# EAGLE board PCB (EAGLE 9.7.0)
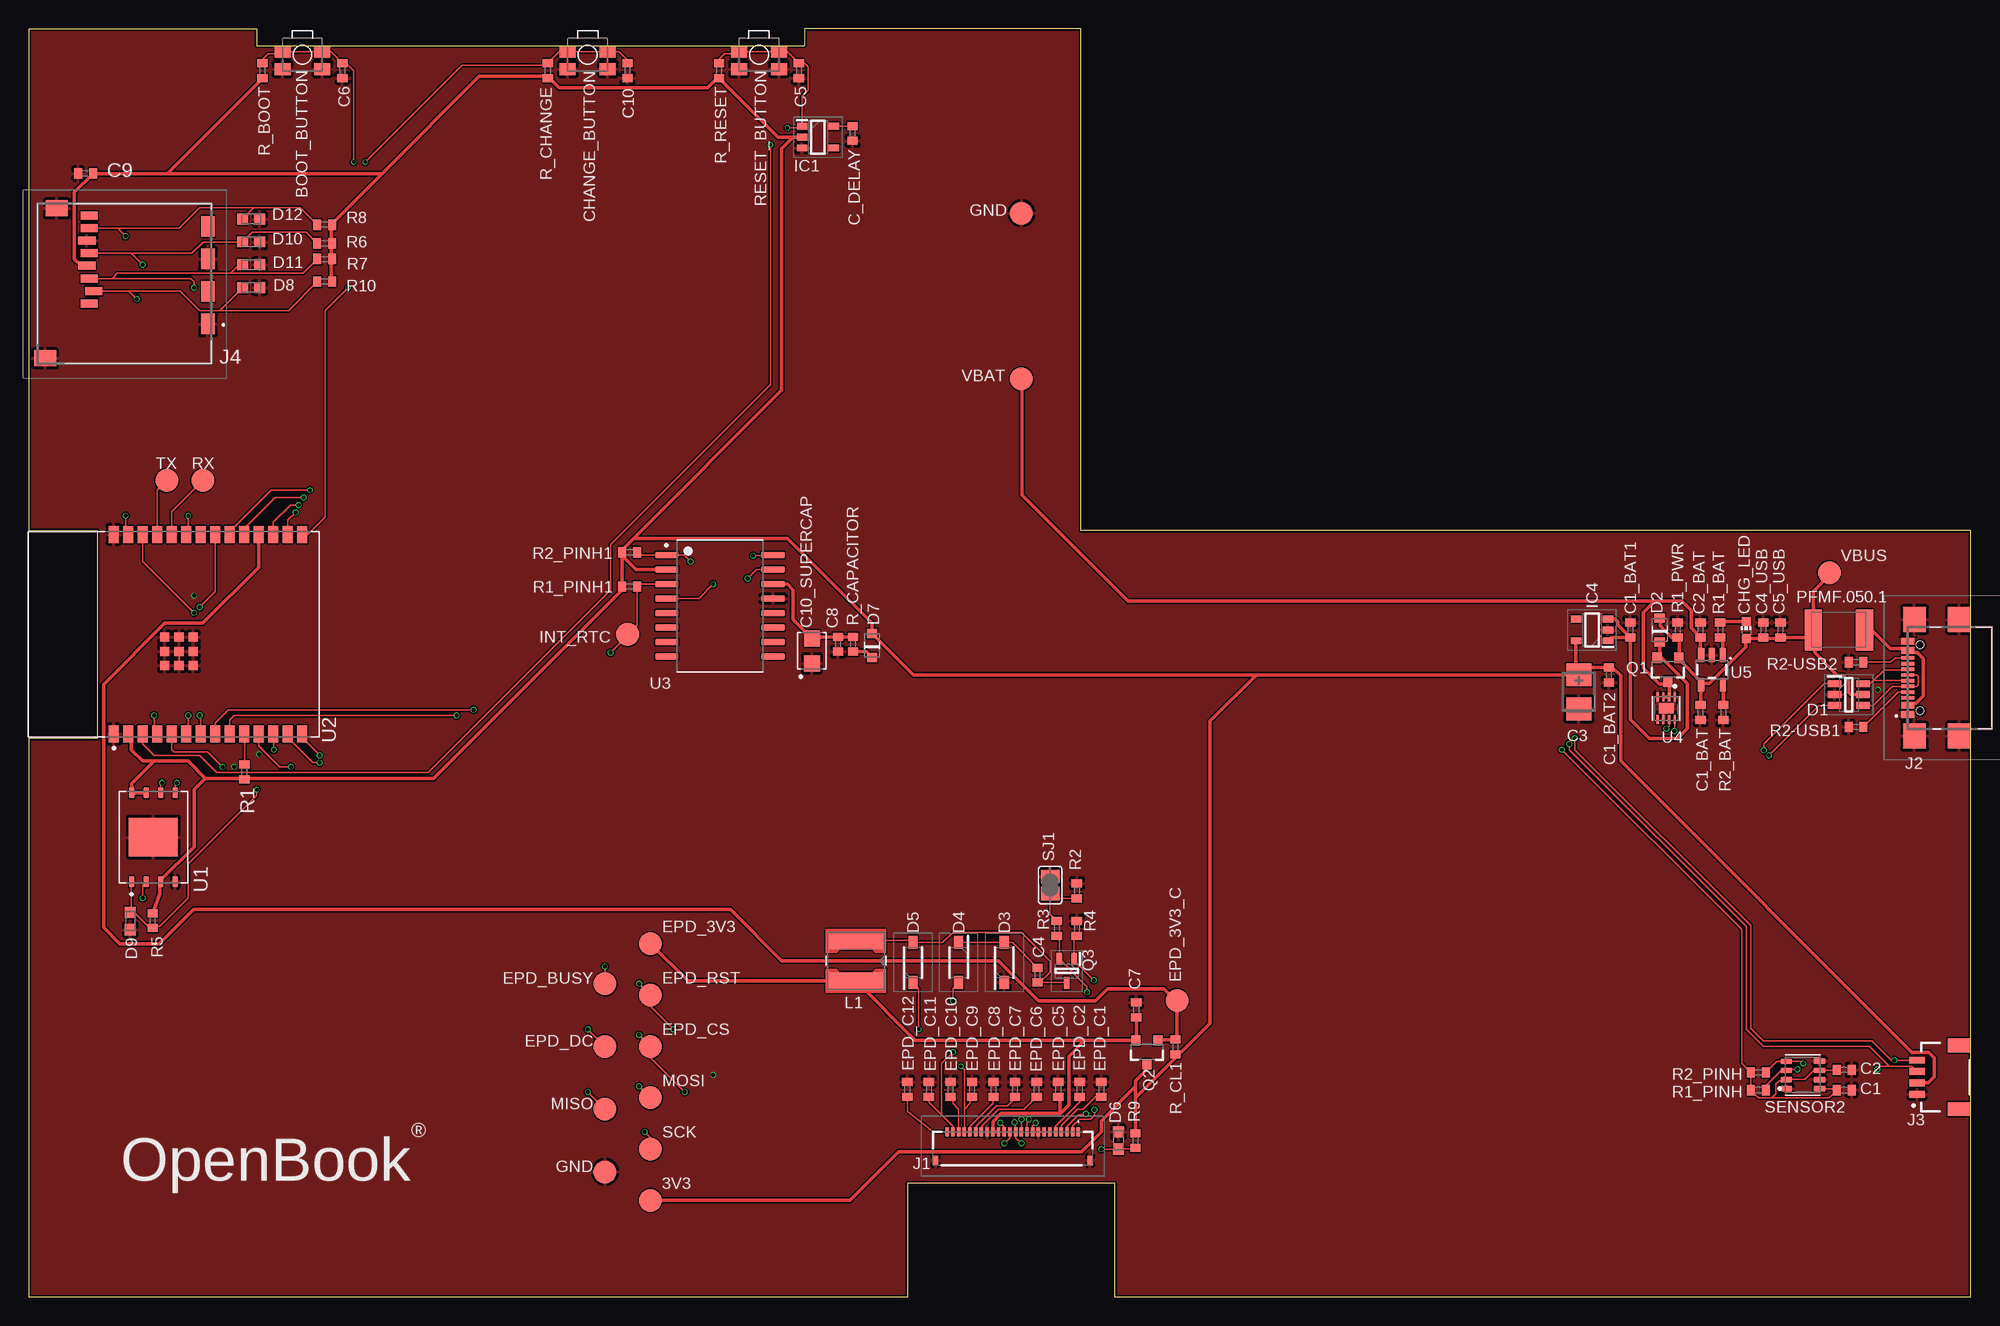
[diagram p0: board, top side]
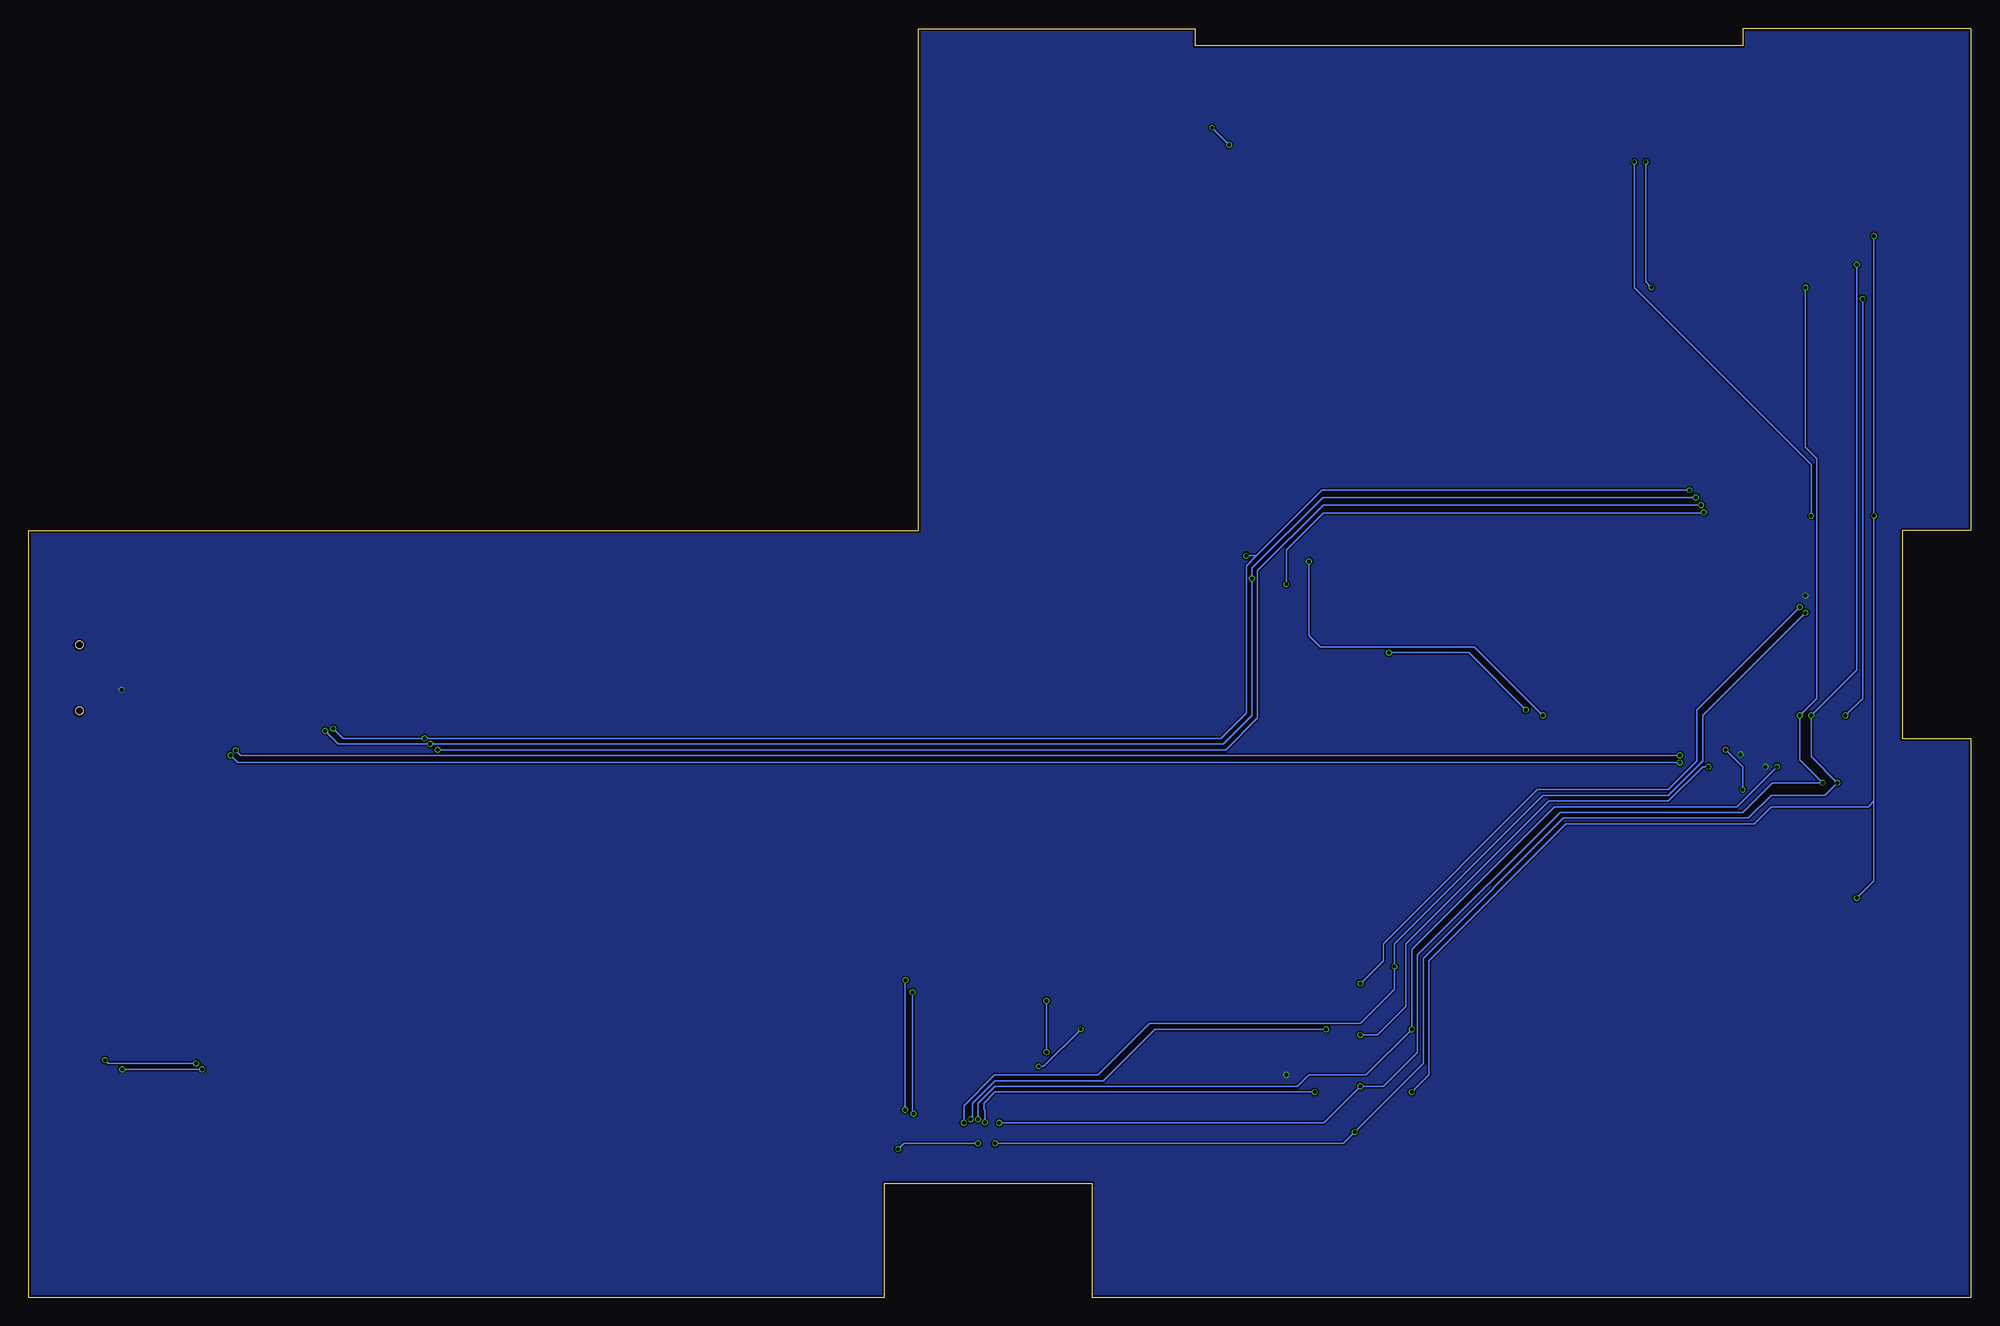
[diagram p1: board, bottom side, seen from below]

Size 170.2 x 111.2 mm. Coordinates in mm from the lower left corner, seen from the top.
Outline: 0,111.2 0,67.2 6,67.2 6,49 0,49 0,0 77,0 77,10 95.2,10 95.2,0 170.2,0 170.2,67.2 92.2,67.2 92.2,111.2 68,111.2 68,109.7 20,109.7 20,111.2 0,111.2
Copper layers (1*16): Top 0.035mm / dielectric 1.6mm / Bottom 0.035mm
Design rules "jlcpcb-2layers.dru *": minimum track width 0.15mm, minimum drill 0.3mm, track to track 5mil, track to pad 5mil, pad to pad 5mil, via to via 5mil, smd to smd 5mil, copper to edge 0.2mm, drill to drill 6mil, minimum pad ring 10mil, minimum via ring 3mil, stop-mask expansion 4mil, vias tented up to drill 0mil, thermal gap 10mil
Net classes: 1 power: width 0.3 mm

## Footprints (pad centres in the part's own frame; a part is rotated, then mirrored left to right if it is on the bottom)
MYBUTTON = smd 1.4 x 1.05: 1 1.75,1.258; 2 -1.75,1.258; 3 -1.75,-0.242; 4 1.75,-0.242
EAGLE-LTSPICE_C0402 = smd 0.7 x 0.9: 1 -0.65,0; 2 0.65,0
RCL_CT3528 = smd 2 x 2.2: + -1.5,0; - 1.5,0
CAPCP3225X100N = smd 1.4 x 1.4: 1 -1.1,0; 2 1.1,0
ADAFRUIT_CHIP-LED0603 = smd 0.8 x 0.8: A 0,-0.75; C 0,0.75
SOT95P280X145-6N = smd 1.2 x 0.6: 1 -1.25,0.95; 2 -1.25,0; 3 -1.25,-0.95; 4 1.25,-0.95; 5 1.25,0; 6 1.25,0.95
ESP32_WROVER_AVX---SD0805S020S1R0_AVX_SD0805S020S1R0_0 = smd 0.8 x 0.9: 1 -1.05,0; 2 1.05,0
SOD3716X135N = smd 1.15 x 0.8: 1 -1.75,0; 2 1.75,0
DIOC1608X36N = smd 0.97 x 0.94: 1 -0.75,0; 2 0.75,0
SOT95P280X125-5N = smd 0.9 x 0.6: 1 -1.4,0.95; 2 -1.4,0; 3 -1.4,-0.95; 4 1.4,-0.95; 5 1.4,0.95
SOT95P280X120-5N = smd 0.9 x 0.6: 1 -1.4,0.95; 2 -1.4,0; 3 -1.4,-0.95; 4 1.4,-0.95; 5 1.4,0.95
FH34SRJ24S05SH99 = smd 0.3 x 0.8: 1 5.75,1.45; 2 5.25,1.45; 3 4.75,1.45; 4 4.25,1.45; 5 3.75,1.45; 6 3.25,1.45; 7 2.75,1.45; 8 2.25,1.45; 9 1.75,1.45; 10 1.25,1.45; 11 0.75,1.45; 12 0.25,1.45; 13 -0.25,1.45; 14 -0.75,1.45; 15 -1.25,1.45; 16 -1.75,1.45; 17 -2.25,1.45; 18 -2.75,1.45; 19 -3.25,1.45; 20 -3.75,1.45; 21 -4.25,1.45; 22 -4.75,1.45; 23 -5.25,1.45; 24 -5.75,1.45 | smd 0.4 x 0.8: MP1 6.75,-1.05; MP2 -6.75,-1.05
SAMACSYS_PARTS_USB4110GFA = smd 0.3 x 1.15: A1 -3.35,3.678; A4 -2.55,3.678; A5 -1.25,3.678; A6 -0.25,3.678; A7 0.25,3.678; A8 1.25,3.678; A9 2.55,3.678; A12 3.35,3.678; B1 3.05,3.678; B4 2.25,3.678; B5 1.75,3.678; B6 0.75,3.678; B7 -0.75,3.678; B8 -1.75,3.678; B9 -2.25,3.678; B12 -3.05,3.678 | smd 2.18 x 2: MP1 -5.11,-0.827; MP2 5.11,-0.827; MP3 -5.11,3.103; MP4 5.11,3.103 | hole 0.65: -2.89,2.603; 2.89,2.603
JST04_1MM_RA = smd 0.6 x 1.35: 1 -1.5,0; 2 -0.5,0; 3 0.5,0; 4 1.5,0 | smd 1.2 x 2: NC1 2.8,-3.675; NC2 -2.8,-3.675
112ATAARR03ATTEND = smd 1.8 x 1.2: G1 10.6,10.4; G2 4.9,10.4; S1 7.75,10.4; S2 2.05,10.4 | smd 1.4 x 1.9: G3 13.6,-3.85; G4 0.45,-2.85 | smd 0.7 x 1.5: P1 8.8,0; P2 7.7,0.4; P3 6.6,0; P4 5.5,-0.2; P5 4.4,0; P6 3.3,-0.2; P7 2.2,0; P8 1.1,0
IND_4828-WE-TPC_WRE = smd 1.524 x 5.08: 1 -1.778,0; 2 1.778,0
ESP32C6_VARISTOR_CT/CN1812 = smd 1.5 x 3.6: 1 -2.25,0; 2 2.25,0
ESP32_WROVER_SPARKFUN-DISCRETESEMI_SOT23-3 = smd 0.8 x 0.9: 1 -0.95,-1; 2 0.95,-1; 3 0,1.1
SOT65P210X110-3N = smd 1.05 x 0.5: 1 -1.05,0.65; 2 -1.05,-0.65; 3 1.05,0
ESP32_WROVER_EAGLE-LTSPICE_R0402 = smd 0.7 x 0.9: 1 -0.65,0; 2 0.65,0
ESP32_WROVER_BME680_PSON80P300X300X100-8N = smd 1.016 x 0.5: 1 1.458,1.2; 2 1.458,0.4; 3 1.458,-0.4; 4 1.458,-1.2; 5 -1.458,-1.22; 6 -1.458,-0.4; 7 -1.458,0.4; 8 -1.458,1.2
SJ = smd 1.168 x 1.6: 1 -0.762,0; 2 0.762,0
TP20R = smd 2 x 2: TP 0,0
SON127P600X800X80-9N = smd 0.94 x 0.44: 1 -3.895,1.905; 2 -3.895,0.635; 3 -3.895,-0.635; 4 -3.895,-1.905; 5 3.895,-1.905; 6 3.895,-0.635; 7 3.895,0.635; 8 3.895,1.905 | smd 3.4 x 4.3: 9 0,0
XCVR_ESP32-C6-WROOM-1-N8 = smd 1.5 x 0.9: 1 -8.75,5.26; 2 -8.75,3.99; 3 -8.75,2.72; 4 -8.75,1.45; 5 -8.75,0.18; 6 -8.75,-1.09; 7 -8.75,-2.36; 8 -8.75,-3.63; 9 -8.75,-4.9; 10 -8.75,-6.17; 11 -8.75,-7.44; 12 -8.75,-8.71; 13 -8.75,-9.98; 14 -8.75,-11.25; 15 8.75,-11.25; 16 8.75,-9.98; 17 8.75,-8.71; 18 8.75,-7.44; 19 8.75,-6.17; 20 8.75,-4.9; 21 8.75,-3.63; 22 8.75,-2.36; 23 8.75,-1.09; 24 8.75,0.18; 25 8.75,1.45; 26 8.75,2.72; 27 8.75,3.99; 28 8.75,5.26 | smd 0.8 x 0.8: 29_1 -2.755,0.79; 29_2 -1.505,0.79; 29_3 -0.255,0.79; 29_4 -2.755,-0.46; 29_5 -1.505,-0.46; 29_6 -0.255,-0.46; 29_7 -2.755,-1.71; 29_8 -1.505,-1.71; 29_9 -0.255,-1.71
SOIC127P1032X265-16N = smd 2.05 x 0.59: 1 -4.655,4.445; 2 -4.655,3.175; 3 -4.655,1.905; 4 -4.655,0.635; 5 -4.655,-0.635; 6 -4.655,-1.905; 7 -4.655,-3.175; 8 -4.655,-4.445; 9 4.655,-4.445; 10 4.655,-3.175; 11 4.655,-1.905; 12 4.655,-0.635; 13 4.655,0.635; 14 4.655,1.905; 15 4.655,3.175; 16 4.655,4.445
SON50P200X200X80-9N = smd 0.76 x 0.27: 1 -0.985,0.75; 2 -0.985,0.25; 3 -0.985,-0.25; 4 -0.985,-0.75; 5 0.985,-0.75; 6 0.985,-0.25; 7 0.985,0.25; 8 0.985,0.75 | smd 0.9 x 1.3: 9 0,0
ESP32_WROVER_SPARKFUN-IC-POWER_SOT23-5 = smd 0.55 x 1.2: 1 -0.95,-1.3; 2 0,-1.3; 3 0.95,-1.3; 4 0.95,1.3; 5 -0.95,1.3

## Placement (x,y rotation side)
BOOT_BUTTON  BUTTON_CUSYOMV1  [MYBUTTON]  24,108.91 180 top
C1  100nF  [EAGLE-LTSPICE_C0402]  159.1,18.17 0 top
C1_BAT  4.7uF  [EAGLE-LTSPICE_C0402]  146.5,51.25 270 top
C1_BAT1  4.7uF  [EAGLE-LTSPICE_C0402]  140.35,58.5 90 top
C1_BAT2  4.7uF  [EAGLE-LTSPICE_C0402]  138.48,54.56 270 top
C2  100nF  [EAGLE-LTSPICE_C0402]  159.1,19.94 0 top
C2_BAT  4.7uF  [EAGLE-LTSPICE_C0402]  146.5,58.5 90 top
C3  100uF  [RCL_CT3528]  135.84,53.07 270 top
C4  4.7uF/25V  [EAGLE-LTSPICE_C0402]  88.4,28.25 270 top
C4_USB  100nF  [EAGLE-LTSPICE_C0402]  152,58.5 90 top
C5  1uF  [EAGLE-LTSPICE_C0402]  67.5,107.5 270 top
C5_USB  4.7uF  [EAGLE-LTSPICE_C0402]  153.5,58.5 90 top
C6  100nF  [EAGLE-LTSPICE_C0402]  27.5,107.5 270 top
C7  10uF  [EAGLE-LTSPICE_C0402]  97.06,25.21 90 top
C8  100nF  [EAGLE-LTSPICE_C0402]  70.94,57.24 270 top
C9  100nF  [EAGLE-LTSPICE_C0402]  5,98.5 180 top
C10  100nF  [EAGLE-LTSPICE_C0402]  52.5,107.5 270 top
C10_SUPERCAP  CPH3225A  [CAPCP3225X100N]  68.65,56.66 90 top
C_DELAY  100nF  [EAGLE-LTSPICE_C0402]  72.2,102.01 270 top
CHANGE_BUTTON  BUTTON_CUSYOMV1  [MYBUTTON]  49,108.91 180 top
CHG_LED  [ADAFRUIT_CHIP-LED0603]  150.5,58.5 0 top
D1  USBLC6-2SC6Y  [SOT95P280X145-6N]  159.5,52.83 0 top
D2  ESP32_WROVER_AVX---SD0805S020S1R0_AVX_SD0805S020S1R0_0_0AVX_SD0805S020S1R0_0_0  [ESP32_WROVER_AVX---SD0805S020S1R0_AVX_SD0805S020S1R0_0]  142.93,58.5 90 top
D3  MBR0530  [SOD3716X135N]  85.5,29.35 90 top
D4  MBR0530  [SOD3716X135N]  81.5,29.35 270 top
D5  MBR0530  [SOD3716X135N]  77.5,29.35 90 top
D6  PGB1010603MR  [DIOC1608X36N]  95.5,13.76 270 top
D7  ESP32_WROVER_AVX---SD0805S020S1R0_AVX_SD0805S020S1R0_0_0AVX_SD0805S020S1R0_0_0  [ESP32_WROVER_AVX---SD0805S020S1R0_AVX_SD0805S020S1R0_0]  73.91,57.14 90 top
D8  PGB1010603MR  [DIOC1608X36N]  19.5,88.5 180 top
D9  PGB1010603MR  [DIOC1608X36N]  8.92,32.98 90 top
D10  PGB1010603MR  [DIOC1608X36N]  19.5,92.5 180 top
D11  PGB1010603MR  [DIOC1608X36N]  19.5,90.5 180 top
D12  PGB1010603MR  [DIOC1608X36N]  19.5,94.5 180 top
EPD_C1  1uF/50V  [EAGLE-LTSPICE_C0402]  94,18.25 90 top
EPD_C2  1uF/50V  [EAGLE-LTSPICE_C0402]  92.11,18.25 90 top
EPD_C5  0.1uF/50V  [EAGLE-LTSPICE_C0402]  90.22,18.25 90 top
EPD_C6  1uF/50V  [EAGLE-LTSPICE_C0402]  88.33,18.25 90 top
EPD_C7  1uF/50V  [EAGLE-LTSPICE_C0402]  86.44,18.25 90 top
EPD_C8  1uF/50V  [EAGLE-LTSPICE_C0402]  84.56,18.25 90 top
EPD_C9  1uF/50V  [EAGLE-LTSPICE_C0402]  82.67,18.25 90 top
EPD_C10  1uF/50V  [EAGLE-LTSPICE_C0402]  80.78,18.25 90 top
EPD_C11  1uF/50V  [EAGLE-LTSPICE_C0402]  78.89,18.25 90 top
EPD_C12  1uF/50V  [EAGLE-LTSPICE_C0402]  77,18.25 90 top
IC1  BD5229G-TR  [SOT95P280X125-5N]  69.17,101.68 0 top
IC4  XC6220A331MR-G  [SOT95P280X120-5N]  137,58.5 180 top
J1  FH34SRJ-24S-0.5SH_99_  [FH34SRJ24S05SH99]  86.24,13.05 0 top
J2  SAMACSYS_PARTS_USB4110-GF-A  [SAMACSYS_PARTS_USB4110GFA]  168.36,54.3 90 top
J3  QWIIC_RIGHT_ANGLE  [JST04_1MM_RA]  165.48,19.3 90 top
J4  112A-TAAR-R03_ATTEND  [112ATAARR03ATTEND]  5.32,95.9 270 top
L1  744043680IND_4828-WE-TPC_WRE  [IND_4828-WE-TPC_WRE]  72.5,29.5 270 top
PFMF.050.1  ESP32C6_VARISTORCN1812  [ESP32C6_VARISTOR_CT/CN1812]  158.62,58.5 180 top
Q1  20V/4.2A/52mΩ/1.4W  [ESP32_WROVER_SPARKFUN-DISCRETESEMI_SOT23-3]  143.65,55.05 180 top
Q2  20V/4.2A/52mΩ/1.4W  [ESP32_WROVER_SPARKFUN-DISCRETESEMI_SOT23-3]  98,21.52 180 top
Q3  SI1308EDL-T1-GE3  [SOT65P210X110-3N]  90.97,28.6 270 top
R1  10k  [ESP32_WROVER_EAGLE-LTSPICE_R0402]  18.92,46.05 270 top
R1_BAT  200  [ESP32_WROVER_EAGLE-LTSPICE_R0402]  148.22,58.5 90 top
R1_PINH  10k  [ESP32_WROVER_EAGLE-LTSPICE_R0402]  151.56,18.17 180 top
R1_PINH1  10k  [ESP32_WROVER_EAGLE-LTSPICE_R0402]  52.67,62.3 180 top
R1_PWRUSB  100k  [ESP32_WROVER_EAGLE-LTSPICE_R0402]  144.5,58.5 270 top
R2  2.2  [ESP32_WROVER_EAGLE-LTSPICE_R0402]  91.86,35.64 270 top
R2-USB1  5K1  [ESP32_WROVER_EAGLE-LTSPICE_R0402]  160.13,50 0 top
R2-USB2  5K1  [ESP32_WROVER_EAGLE-LTSPICE_R0402]  160.13,55.67 180 top
R2_BAT  2k  [ESP32_WROVER_EAGLE-LTSPICE_R0402]  148.5,51.25 90 top
R2_PINH  10k  [ESP32_WROVER_EAGLE-LTSPICE_R0402]  151.56,19.72 180 top
R2_PINH1  10k  [ESP32_WROVER_EAGLE-LTSPICE_R0402]  52.67,65.3 180 top
R3  0.47  [ESP32_WROVER_EAGLE-LTSPICE_R0402]  90.1,32.35 270 top
R4  10k  [ESP32_WROVER_EAGLE-LTSPICE_R0402]  91.86,32.35 270 top
R5  10k  [ESP32_WROVER_EAGLE-LTSPICE_R0402]  10.88,33.02 90 top
R6  10k  [ESP32_WROVER_EAGLE-LTSPICE_R0402]  25.95,92.37 0 top
R7  10k  [ESP32_WROVER_EAGLE-LTSPICE_R0402]  25.95,91 0 top
R8  10k  [ESP32_WROVER_EAGLE-LTSPICE_R0402]  25.95,94 0 top
R9  10k  [ESP32_WROVER_EAGLE-LTSPICE_R0402]  97,13.74 90 top
R10  10k  [ESP32_WROVER_EAGLE-LTSPICE_R0402]  25.95,89.02 0 top
R_BOOT  10k  [ESP32_WROVER_EAGLE-LTSPICE_R0402]  20.5,107.5 90 top
R_CAPACITOR  15  [ESP32_WROVER_EAGLE-LTSPICE_R0402]  72.25,57.24 270 top
R_CHANGE  10k  [ESP32_WROVER_EAGLE-LTSPICE_R0402]  45.5,107.5 90 top
R_CL1  10k  [ESP32_WROVER_EAGLE-LTSPICE_R0402]  100.5,21.97 270 top
R_RESET  10k  [ESP32_WROVER_EAGLE-LTSPICE_R0402]  60.5,107.5 90 top
RESET_BUTTON  BUTTON_CUSYOMV1  [MYBUTTON]  64,108.91 180 top
SENSOR2  ESP32_WROVER_BME680_BME680  [ESP32_WROVER_BME680_PSON80P300X300X100-8N]  155.47,19.5 180 top
SJ1  [SJ]  89.52,36.14 270 top
TP1  TPTP20R  [TP20R]  12.12,71.6 0 top
TP2  TPTP20R  [TP20R]  15.28,71.6 0 top
TP3  TPTP20R  [TP20R]  87,80.5 0 top
TP4  TPTP20R  [TP20R]  87,95 0 top
TP5  TPTP20R  [TP20R]  50.5,11 90 top
TP6  TPTP20R  [TP20R]  50.5,16.5 90 top
TP7  TPTP20R  [TP20R]  54.5,17.5 270 top
TP8  TPTP20R  [TP20R]  54.5,13 270 top
TP9  TPTP20R  [TP20R]  50.5,27.5 270 top
TP10  TPTP20R  [TP20R]  54.5,22 270 top
TP11  TPTP20R  [TP20R]  50.5,22 270 top
TP12  TPTP20R  [TP20R]  54.5,26.5 270 top
TP13  TPTP20R  [TP20R]  100.64,26.02 0 top
TP14  TPTP20R  [TP20R]  157.79,63.52 0 top
TP15  TPTP20R  [TP20R]  52.49,58.1 0 top
TP16  TPTP20R  [TP20R]  54.5,8.5 90 top
TP17  TPTP20R  [TP20R]  54.5,31 270 top
U1  W25Q512JVEIQ  [SON127P600X800X80-9N]  10.94,40.33 90 top
U2  ESP32-C6-WROOM-1-N8  [XCVR_ESP32-C6-WROOM-1-N8]  12.73,58.12 90 top
U3  DS3231SN#  [SOIC127P1032X265-16N]  60.59,60.6 0 top
U4  MAX17048G+T10  [SON50P200X200X80-9N]  143.5,51.63 270 top
U5  ESP32_WROVER_SPARKFUN-IC-POWER_MCP73831  [ESP32_WROVER_SPARKFUN-IC-POWER_SOT23-5]  147.5,55 180 top

## Library data of the parts
BOOT_BUTTON CHANGE_BUTTON CHG_LED PFMF.050.1 RESET_BUTTON SJ1 TP1-TP4 TP6-TP17 = tsc-lib-v1
C1 C1_BAT C1_BAT1 C1_BAT2 C2 C2_BAT C4 C4_USB C5 C5_USB C6-C10 C_DELAY EPD_C1 EPD_C2 EPD_C5-EPD_C12 = tsc-lib-v1; SPICEMODEL: NONE; SPICEPREFIX: C
C3 = tsc-lib-v1; SPICEPREFIX: C
C10_SUPERCAP = tsc-lib-v1; AVAILABILITY: Not in stock; CHECK_PRICES: https://www.snapeda.com/parts/CPH3225A/Seiko+Instruments/view-part/?ref=eda; DESCRIPTION: 11 mF (EDLC) Supercapacitor 3.3 V 1210 (3225 Metric) - -; MF: Seiko Instruments; MP: CPH3225A; PACKAGE: 1210 Seiko; PRICE: None; PURCHASE-URL: https://www.snapeda.com/api/url_track_click_mouser/?unipart_id=562593&manufacturer=Seiko Instruments&part_name=CPH3225A&search_term=None; SNAPEDA_LINK: https://www.snapeda.com/parts/CPH3225A/Seiko+Instruments/view-part/?ref=snap
D1 = tsc-lib-v1; AVAILABILITY: In Stock; CHECK_PRICES: https://www.snapeda.com/parts/USBLC6-2SC6Y/STMicroelectronics/view-part/?ref=eda; DESCRIPTION: 17V Clamp 5A (8/20µs) Ipp Tvs Diode Surface Mount SOT-23-6; MF: STMicroelectronics; MP: USBLC6-2SC6Y; PACKAGE: SOT-23-6 STMicroelectronics; PRICE: None; SNAPEDA_LINK: https://www.snapeda.com/parts/USBLC6-2SC6Y/STMicroelectronics/view-part/?ref=snap
D2 D7 = tsc-lib-v1; CENTROID_NOT_SPECIFIED: No; DATASHEET: http://datasheets.avx.com/schottky.pdf; DIGIKEY_DESCRIPTION: DIODE SCHOTTKY 20V 1A 0805; DIGIKEY_PART_NUMBER: 478-7800-1-ND; LEAD_FREE: yes; MF: AVX; MOUSER_PART_NUMBER: 581-SD0805S020S1R0; PACKAGE: 0805 (2012 metric); PREFIX: D; ROHS: yes; TEMPERATURE_RANGE_HIGH: +125°C; TEMPERATURE_RANGE_LOW: -55°C
D3-D5 = tsc-lib-v1; AVAILABILITY: In Stock; CHECK_PRICES: https://www.snapeda.com/parts/MBR0530/Onsemi/view-part/?ref=eda; DESCRIPTION: Diode Schottky 30 V 500mA Surface Mount SOD-123; MF: ON Semiconductor; MP: MBR0530; PACKAGE: SOD-123-2 ON Semiconductor; PRICE: None; PURCHASE-URL: https://www.snapeda.com/api/url_track_click_mouser/?unipart_id=179458&manufacturer=ON Semiconductor&part_name=MBR0530&search_term=None; SNAPEDA_LINK: https://www.snapeda.com/parts/MBR0530/Onsemi/view-part/?ref=snap
D6 D8-D12 = tsc-lib-v1; AVAILABILITY: In Stock; CHECK_PRICES: https://www.snapeda.com/parts/PGB1010603MR/Littelfuse/view-part/?ref=eda; DESCRIPTION: 150V (Typ) Clamp - Ipp Tvs Diode Surface Mount 0603 (1608 Metric); MF: Littelfuse Inc.; MP: PGB1010603MR; PACKAGE: 0603 Littelfuse Inc.; PRICE: None; PURCHASE-URL: https://www.snapeda.com/api/url_track_click_mouser/?unipart_id=5659453&manufacturer=Littelfuse Inc.&part_name=PGB1010603MR&search_term=None; SNAPEDA_LINK: https://www.snapeda.com/parts/PGB1010603MR/Littelfuse/view-part/?ref=snap
IC1 = tsc-lib-v1; DESCRIPTION: Voltage Detector with Adjustable Delay Time: CMOS processes are utilized to develop high precision, low current consumption CMOS reset ICs that allow arbitrary setting of the delay time. The extensive lineup includes both Nch Open Drain and CMOS output types in a wide range of detection voltages (from 2.3V to 6.0V, in 0.1V steps), enabling selection of the ideal solution based on customer requirements. In addition, the entire series is of course both lead-free and RoHS-compliant.; HEIGHT: 1.25mm; MANUFACTURER_NAME: ROHM Semiconductor; MANUFACTURER_PART_NUMBER: BD5229G-TR; MOUSER_PART_NUMBER: 755-BD5229G-TR; MOUSER_PRICE-STOCK: https://www.mouser.co.uk/ProductDetail/ROHM-Semiconductor/BD5229G-TR?qs=4kLU8WoGk0vvnhrrYwdszw%3D%3D
IC4 = tsc-lib-v1; DESCRIPTION: LDO Voltage Regulators; HEIGHT: 1.2mm; MANUFACTURER_NAME: Torex; MANUFACTURER_PART_NUMBER: XC6220A331MR-G; MOUSER_PART_NUMBER: 865-XC6220A331MR-G; MOUSER_PRICE-STOCK: https://www.mouser.co.uk/ProductDetail/Torex-Semiconductor/XC6220A331MR-G?qs=AsjdqWjXhJ8ZSWznL1J0gg%3D%3D
J1 = tsc-lib-v1; DESCRIPTION: 24 Position FFC, FPC Connector Contacts, Top and Bottom 0.020" (0.50mm) Surface Mount, Right Angle; HEIGHT: 1.1mm; MANUFACTURER_NAME: Hirose; MANUFACTURER_PART_NUMBER: FH34SRJ-24S-0.5SH(99); MOUSER_PART_NUMBER: 798-FH34SRJ24S05SH99; MOUSER_PRICE-STOCK: https://www.mouser.co.uk/ProductDetail/Hirose-Connector/FH34SRJ-24S-0.5SH99?qs=vcbW%252B4%252BSTIpKBl5ap9J8Fw%3D%3D
J2 = tsc-lib-v1; DESCRIPTION: CONN USB 2.0 TYPE-C R/A SMT; HEIGHT: 3.26mm; MANUFACTURER_NAME: GCT (GLOBAL CONNECTOR TECHNOLOGY); MANUFACTURER_PART_NUMBER: USB4110-GF-A; MOUSER_PART_NUMBER: 640-USB4110-GF-A; MOUSER_PRICE-STOCK: https://www.mouser.co.uk/ProductDetail/GCT/USB4110-GF-A?qs=KUoIvG%2F9IlYiZvIXQjyJeA%3D%3D
J3 = tsc-lib-v1; PROD_ID: CONN-13694
J4 = tsc-lib-v1; DESCRIPTION: Micro SD Card Socket, Push-Push Type, Top Mount, SMT, H=1.83mm, 10u; HEIGHT: 1.9mm; MANUFACTURER_NAME: ATTEND; MANUFACTURER_PART_NUMBER: 112A-TAAR-R03 ATTEND
L1 = tsc-lib-v1; COPYRIGHT: Copyright (C) 2024 Ultra Librarian. All rights reserved.; MANUFACTURER_PART_NUMBER: 744043680; MFR_NAME: Wurth Electronics; VAL: 68uH
Q1 Q2 = tsc-lib-v1; PROD_ID: TRAN-14388
Q3 = tsc-lib-v1; AVAILABILITY: In Stock; CHECK_PRICES: https://www.snapeda.com/parts/SI1308EDL-T1-GE3/Vishay+Siliconix/view-part/?ref=eda; DESCRIPTION: Si1308EDL-T1-GE3 N-channel MOSFET Transistor, 1.5 A, 30 V, 3-Pin SC-70 | Siliconix / Vishay SI1308EDL-T1-GE3; MF: Vishay Siliconix; MP: SI1308EDL-T1-GE3; PACKAGE: SOT-323 Vishay Semiconductor; PRICE: None; PURCHASE-URL: https://www.snapeda.com/api/url_track_click_mouser/?unipart_id=274603&manufacturer=Vishay Siliconix&part_name=SI1308EDL-T1-GE3&search_term=None; SNAPEDA_LINK: https://www.snapeda.com/parts/SI1308EDL-T1-GE3/Vishay+Siliconix/view-part/?ref=snap
R1 R1_BAT R1_PINH R1_PINH1 R1_PWRUSB R2 R2-USB1 R2-USB2 R2_BAT R2_PINH R2_PINH1 R3-R10 R_BOOT R_CAPACITOR R_CHANGE R_CL1 R_RESET = tsc-lib-v1; SPICEMODEL: NONE; SPICEPREFIX: R
SENSOR2 = tsc-lib-v1; AVAILABILITY: Unavailable; DESCRIPTION: Integrated Environmental Unit; MF: Bosch Sensortec; MP: BME680; PACKAGE: LGA-8 Bosch Tools; PRICE: None
TP5 = tsc-lib-v1; BOARD_NAME: OpenBook; REGISTER: ®
U1 = tsc-lib-v1; AVAILABILITY: In Stock; CHECK_PRICES: https://www.snapeda.com/parts/W25Q512JVEIQ/Winbond+Electronics/view-part/?ref=eda; DESCRIPTION: FLASH - NOR Memory IC 512Mb (64M x 8) SPI - Quad I/O 133 MHz 8-WSON (8x6); MF: Winbond Electronics; MP: W25Q512JVEIQ; PACKAGE: Package; PRICE: None; SNAPEDA_LINK: https://www.snapeda.com/parts/W25Q512JVEIQ/Winbond+Electronics/view-part/?ref=snap
U2 = tsc-lib-v1; AVAILABILITY: In Stock; CHECK_PRICES: https://www.snapeda.com/parts/ESP32-C6-WROOM-1-N8/Espressif+Systems/view-part/?ref=eda; DESCRIPTION: Multiprotocol Modules ESP32-C6 module, Wi-Fi 6 in 2.4 GHz band, Bluetooth 5, Zigbee 3.0 and Thread. ESP34-WROOM Compatible - ENGINEERING SAMPLE; MF: Espressif Systems; MP: ESP32-C6-WROOM-1-N8; PACKAGE: None; PRICE: None; SNAPEDA_LINK: https://www.snapeda.com/parts/ESP32-C6-WROOM-1-N8/Espressif+Systems/view-part/?ref=snap
U3 = tsc-lib-v1; AVAILABILITY: In Stock; CHECK_PRICES: https://www.snapeda.com/parts/DS3231SN%23/Analog+Devices/view-part/?ref=eda; DESCRIPTION: Extremely Accurate I²C-Integrated RTC/TCXO/Crystal; MF: Analog Devices; MP: DS3231SN#; PACKAGE: SOIC-16 Maxim; PRICE: None; PURCHASE-URL: https://www.snapeda.com/api/url_track_click_mouser/?unipart_id=99048&manufacturer=Analog Devices&part_name=DS3231SN#&search_term=None; SNAPEDA_LINK: https://www.snapeda.com/parts/DS3231SN%23/Analog+Devices/view-part/?ref=snap
U4 = tsc-lib-v1; AVAILABILITY: In Stock; CHECK_PRICES: https://www.snapeda.com/parts/MAX17048G+T10/Analog+Devices/view-part/?ref=eda; DESCRIPTION: 3µA 1-Cell/2-Cell Fuel Gauge with ModelGauge; MF: Analog Devices; MP: MAX17048G+T10; PACKAGE: TDFN-8 Maxim; PRICE: None; PURCHASE-URL: https://www.snapeda.com/api/url_track_click_mouser/?unipart_id=329239&manufacturer=Analog Devices&part_name=MAX17048G+T10&search_term=None; SNAPEDA_LINK: https://www.snapeda.com/parts/MAX17048G+T10/Analog+Devices/view-part/?ref=snap
U5 = tsc-lib-v1; PROD_ID: IC-09995

## Nets
3V3 [power]: C1_BAT2.1 C3.+ C9.1 D7.2 IC1.2 IC4.5 J3.2 J4.P4 Q2.3 R1.2 R1_PINH1.2 R2_PINH1.2 R5.2 R6.2 R7.2 R8.2 R9.2 R10.2 R_BOOT.1 R_CHANGE.1 R_CL1.2 R_RESET.1 TP16.TP U1.3 U1.7 U1.8 U2.2 U3.2
32KHZ: R2_PINH1.1 U2.9 U3.1
DN: D1.4 J2.A7 J2.B7
DP: D1.6 J2.A6 J2.B6
EPD_3V3 [power]: C7.1 EPD_C5.1 J1.15 J1.16 L1.2 Q2.2 TP17.TP
EPD_3V3_C [power]: Q2.1 R_CL1.1 TP13.TP U2.18
EPD_BUSY: J1.9 TP9.TP U2.26
EPD_CS: D6.2 J1.12 R9.1 TP10.TP U2.11
EPD_DC: J1.11 TP11.TP U2.5
EPD_RST: J1.10 TP12.TP U2.21
FLASH_CS: D9.2 R5.1 U1.1 U2.12
GDR: J1.2 Q3.1 R4.2
GND: BOOT_BUTTON.1 BOOT_BUTTON.2 C1.2 C1_BAT1.2 C1_BAT2.2 C1_BAT.2 C2.2 C2_BAT.2 C3.- C4_USB.2 C5.2 C5_USB.2 C6.2 C7.2 C8.2 C9.2 C10.2 C10_SUPERCAP.1 C_DELAY.2 CHANGE_BUTTON.1 CHANGE_BUTTON.2 D1.2 D3.1 D6.1 D8.1 D9.1 D10.1 D11.1 D12.1 EPD_C1.2 EPD_C2.2 EPD_C5.2 EPD_C6.2 EPD_C7.2 EPD_C8.2 EPD_C9.2 EPD_C10.2 EPD_C11.2 EPD_C12.2 IC1.3 IC4.2 J1.8 J1.17 J1.MP1 J1.MP2 J2.A1 J2.A12 J2.B1 J2.B12 J2.MP1 J2.MP2 J2.MP3 J2.MP4 J3.1 J4.G1 J4.G2 J4.G3 J4.G4 J4.P6 R1_PWRUSB.1 R2-USB1.1 R2-USB2.2 R2.1 R2_BAT.1 R4.1 RESET_BUTTON.1 RESET_BUTTON.2 SENSOR2.1 SENSOR2.5 SENSOR2.7 SJ1.1 TP4.TP TP5.TP U1.4 U1.9 U2.1 U2.28 U2.29_1 U2.29_2 U2.29_3 U2.29_4 U2.29_5 U2.29_6 U2.29_7 U2.29_8 U2.29_9 U3.13 U4.1 U4.4 U4.6 U4.9 U5.2
GPIO8: R1.1 U2.10
I2C_PW: C1.1 C2.1 R1_PINH.2 R2_PINH.2 SENSOR2.2 SENSOR2.6 SENSOR2.8 U2.17
INT_RTC: R1_PINH1.1 TP15.TP U2.8 U3.3
IO/BOOT: BOOT_BUTTON.3 BOOT_BUTTON.4 C6.1 R_BOOT.2 U2.15
IO/CHANGE: C10.1 CHANGE_BUTTON.3 CHANGE_BUTTON.4 R_CHANGE.2 U2.23
MISO: D12.2 J4.P7 R8.1 TP6.TP U1.2 U2.27
MOSI: D11.2 J1.14 J4.P3 R7.1 TP7.TP U1.5 U2.7
N$1: D7.1 R_CAPACITOR.2
N$2: J2.A5 R2-USB1.2
N$3: J2.B5 R2-USB2.1
N$4: C1_BAT1.1 D2.1 IC4.1 IC4.3 Q1.2
N$5: C4.1 D3.2 D4.1
N$6: R2_BAT.2 U5.5
N$7: EPD_C12.1 J1.24
N$8: R1_BAT.1 U5.1
N$9: CHG_LED.C R1_BAT.2
N$10: C_DELAY.1 IC1.5
N$13: EPD_C1.1 J1.4
N$14: EPD_C2.1 J1.5
N$25: EPD_C6.1 J1.18
N$26: EPD_C7.1 J1.19
N$27: EPD_C8.1 J1.20
N$29: EPD_C10.1 J1.22
PREVGH: D5.1 EPD_C9.1 J1.21
PREVGL: D4.2 EPD_C11.1 J1.23
RESE: J1.3 Q3.2 R3.2
RESE': R2.2 R3.1 SJ1.2
RESET: C5.1 IC1.1 R_RESET.2 RESET_BUTTON.3 RESET_BUTTON.4 U2.3
RTC_RST: U2.16 U3.4
RX: TP2.TP U2.24
SCK: D10.2 J1.13 J4.P5 R6.1 TP8.TP U1.6 U2.6
SCL: J3.4 R2_PINH.1 SENSOR2.4 U2.20 U3.16 U4.7
SDA: J3.3 R1_PINH.1 SENSOR2.3 U2.19 U3.15 U4.8
SRC: C4.2 D5.2 L1.1 Q3.3
SS_SD: D8.2 J4.P2 R10.1 U2.4
TX: TP1.TP U2.25
USB_D+: D1.1 U2.14
USB_D-: D1.3 U2.13
VBAT [power]: C2_BAT.1 Q1.3 TP3.TP U4.2 U4.3 U5.3
VBUS [power]: C1_BAT.1 C4_USB.1 C5_USB.1 CHG_LED.A D1.5 D2.2 PFMF.050.1.2 Q1.1 R1_PWRUSB.2 TP14.TP U5.4
VRTC [power]: C8.1 C10_SUPERCAP.2 R_CAPACITOR.1 U3.14
VUSB [power]: J2.A4 J2.A9 J2.B4 J2.B9 PFMF.050.1.1

## Tracks (layer width: path | path; a pad name or v marks a point on that pad's centre or on a via)
3V3
  Top 0.3: 45.5,107 46.5,106 59.5,106 60.5,107 R_RESET.1 65.67,101.68 67,101.68 | 26.5,91 26.5,89 R10.2 | 26.5,94 26.5,92.5 R6.2 26.5,92 26.5,91 | 26.5,91 R7.2 | 45.5,107 39.5,107 31,98.5 | 26.5,94 31,98.5 | 45.5,107 R_CHANGE.1 | 26.5,94 R8.2 | R5.2 11.5,35.37 11.5,36 U1.3 11.5,36.5 14.5,39.5 14.5,44.5 15.5,45.5 | 15.5,45.5 18.5,45.5 R1.2 19,45.5 35.5,45.5 52,62 R1_PINH1.2 52,62.5 52,65 | U2.2 9,49 9,48 10,47 11,47 | 53,66.5 66.5,66.5 73.91,59.09 D7.2 77.53,54.57 107.57,54.57 | 53,66.5 52,65.5 R2_PINH1.2 52,65 | 97,18.5 97,19 98,20 Q2.3 | 97,18.5 97,17.5 | 97,17.5 R9.2 | 97,17.5 100.5,21 R_CL1.2 100.82,21.32 103.5,24 103.5,50.5 107.57,54.57 | TP16.TP 72,8.5 76.25,12.75 92.25,12.75 94,14.5 94,15.5 97,18.5 | 12.15,98.5 31,98.5 | R_BOOT.1 12.15,98.5 | 12.15,98.5 C9.1 4,96.85 4,91 4.6,90.4 J4.P4 | 53,66.5 66,79.5 66,100.68 67,101.68 | IC1.2 67,101.68 | J3.2 166.47,18.8 167,19.33 167,21 166.5,21.5 165,21.5 139.5,47 139.5,54.5 138.79,55.21 C1_BAT2.1 135.81,55.21 135.6,55 | U3.2 53.23,63.78 52,65 | IC4.5 135.6,55 | 135.6,55 135.6,54.81 C3.+ 107.57,54.57 | 15.5,45.5 14,47 11,47 | 11,47 9.04,45.04 U1.8 U1.7
32KHZ  (via drill 0.35)
  Top 0.15: R2_PINH1.1 53.58,65.05 U3.1 57.45,65.05 v58,64.5 | U2.9 17.63,50.63 18,51 v37.5,51
  Bottom 0.15: v37.5,51 43.5,57 57,57 58,58 v58,64.5
DN
  Top 0.15: D1.4 161.65,51.88 163.32,53.55 J2.B7 165.45,53.55 165.6,53.7 165.6,54.4 165.45,54.55 J2.A7
DP
  Top 0.15: D1.6 161.38,53.78 161.65,54.05 | J2.B6 164.63,55 162.6,55 161.65,54.05 | J2.A6 161.65,54.05
EPD_3V3
  Top 0.3: C7.1 97.09,24.52 97.09,22.58 Q2.2 92.52,22.52 | 90.4,16.14 85.22,16.14 84.49,15.4 J1.16 J1.15 | 92.52,22.52 91.15,21.15 91.15,16.89 90.4,16.14 | 92.52,22.52 77.7,22.52 L1.2 57.78,27.72 TP17.TP | 90.4,16.14 90.38,16.12 90.38,17.44 EPD_C5.1
EPD_3V3_C
  Top 0.3: Q2.1 98.96,22.58 100.48,22.58 R_CL1.1 100.62,22.71 100.62,25.97 TP13.TP 100.48,26.04 99.5,27.02 94.52,27.02 93.5,26 88.5,26 85,29.5 66,29.5 61.5,34 14.47,34 11.47,31 8,31 6.57,32.43 6.57,53.73 11.93,59.09 15.26,59.09 20.15,63.98 20.15,66.83 U2.18
EPD_BUSY  (via drill 0.35)
  Top 0.15: U2.26 10.01,64.49 v14.5,60 | v50.5,29 TP9.TP | J1.9 87.99,15 88.25,15.26 v88.25,15.3
  Bottom 0.15: v14.5,60 23.5,51 23.5,47 26.5,44 37.5,44 50.5,31 v50.5,29 50.5,27 53.5,24 72,24 76.5,19.5 85.55,19.5 88.25,16.8 v88.25,15.3
EPD_CS  (via drill 0.35)
  Top 0.15: R9.1 96.91,13.01 D6.2 v94,13 | U2.11 20.17,48.33 22,46.5 v23,46.5 | v87,13.5 v86.99,13.5 86.49,14 J1.12 86.49,15.26 v86.4,15.35 | v53.5,23 TP10.TP 54.5,21 v57.5,18
  Bottom 0.15: v23,46.5 23.5,46.5 26.5,43.5 37,43.5 49.5,31 49.5,25.5 52,23 v53.5,23 | v87,13.5 93.5,13.5 v94,13 | v86.4,15.35 86.4,16.4 86.5,16.5 86.5,17 85.5,18 v57.5,18
EPD_DC  (via drill 0.35)
  Top 0.15: U2.5 12.55,48 12.75,47.8 15.7,47.8 v17,46.5 | v49,23.5 TP11.TP | J1.11 v86.99,15.59 v87,15.6
  Bottom 0.15: v17,46.5 20.5,43 36.5,43 49,30.5 v49,23.5 53,19.5 58,19.5 59,18.5 85.5,18.5 87,17 v87,15.6
EPD_RST  (via drill 0.35)
  Top 0.15: U2.21 16.36,61.86 v15,60.5 | v53.5,27.5 TP12.TP 54.5,25.5 v56.5,23.5 | J1.10 87.49,15.44 v87.65,15.6
  Bottom 0.15: v15,60.5 24,51.5 24,47 26.5,44.5 38,44.5 51.5,31 51.5,29.5 v53.5,27.5 | v87.65,15.6 87.5,15.75 87.5,17 85.5,19 76,19 71.5,23.5 v56.5,23.5
FLASH_CS  (via drill 0.3)
  Top 0.15: 9,34 10.5,32.5 R5.1 11,32.5 11.5,32.5 14,35 14,38 20,44 v20,44.5 | 9,34 9,36 U1.1 | 9,34 D9.2 | v21.5,48 21.5,49 U2.12
  Bottom 0.15: v21.5,48 20,46.5 v20,44.5
GDR  (via drill 0.35)
  Top 0.15: R4.2 91.62,31.46 Q3.1 91.62,29.53 v93.35,27.8 | v93.4,16.45 93.4,15.95 93.05,15.6 92.1,15.6 91.49,14.99 J1.2
  Bottom 0.15: v93.35,27.8 93.4,27.75 v93.4,16.45
GND  (via drill 0.35)
  Top 0.15: U2.29_4 U2.29_5 | U4.6 143.25,51.38 U4.9
  other vias: 14.5,61.5 162.05,53.25 60,19.5 18,46.5 20.2,47.6
  pour Top: 6.06,48.96 6.04,48.94 6.02,48.92 0.08,48.92 0.08,0.08 76.92,0.08 76.92,9.98 76.92,10.02 76.94,10.04 76.96,10.06 76.98,10.08 77.02,10.08 95.22,10.08 95.24,10.06 95.26,10.04 95.28,10.02 95.28,0.08 170.12,0.08 170.12,67.12 92.18,67.12 92.16,67.14 92.14,67.16 92.12,67.18 92.12,111.12 68.08,111.12 68.08,109.68 68.06,109.66 68.04,109.64 68.02,109.62 67.98,109.62 19.98,109.62 19.96,109.64 19.94,109.66 19.92,109.68 19.92,111.12 0.08,111.12 0.08,67.28 6.02,67.28 6.04,67.26 6.06,67.24 6.08,67.22 6.08,48.98
  pour Bottom: 6.06,48.96 6.04,48.94 6.02,48.92 0.08,48.92 0.08,0.08 76.92,0.08 76.92,9.98 76.92,10.02 76.94,10.04 76.96,10.06 76.98,10.08 77.02,10.08 95.22,10.08 95.24,10.06 95.26,10.04 95.28,10.02 95.28,0.08 170.12,0.08 170.12,67.12 92.18,67.12 92.16,67.14 92.14,67.16 92.12,67.18 92.12,111.12 68.08,111.12 68.08,109.68 68.06,109.66 68.04,109.64 68.02,109.62 67.98,109.62 19.98,109.62 19.96,109.64 19.94,109.66 19.92,109.68 19.92,111.12 0.08,111.12 0.08,67.28 6.02,67.28 6.04,67.26 6.06,67.24 6.08,67.22 6.08,48.98
GPIO8
  Top 0.15: U2.10 18.92,49.35 R1.1
I2C_PW  (via drill 0.35)
  Top 0.15: SENSOR2.8 158.32,18.3 C1.1 157.78,17.5 152.75,17.5 | C2.1 158.41,19.9 SENSOR2.6 156.43,19.9 155.63,19.1 SENSOR2.2 153.92,19 153.4,19 153.1,18.7 153.1,17.85 152.75,17.5 | 152.75,17.5 151.59,17.5 R1_PINH.2 R2_PINH.2 150.11,20.52 150.11,32.24 v134.35,48 | U2.17 21.44,67.94 22.95,69.45 v23.65,69.45
  Bottom 0.15: v23.65,69.45 56.75,69.45 62.5,63.7 62.5,50.8 65.3,48 v134.35,48
INT_RTC  (via drill 0.35)
  Top 0.15: U3.3 53.52,62.51 R1_PINH1.1 53.32,58.93 TP15.TP 52.49,57.99 v51,56.5 | U2.8 16.36,50.36 17.5,51.5 v39,51.5
  Bottom 0.15: v39,51.5 44,56.5 v51,56.5
IO/BOOT  (via drill 0.3)
  Top 0.15: R_BOOT.2 20.5,108.5 21,109 22.1,109 BOOT_BUTTON.4 BOOT_BUTTON.3 26.5,109.15 C6.1 27.5,108 28,108 28.5,107.5 v28.5,99.5 | v28,88.5 26,86.5 26,68.39 24.48,66.87 U2.15
  Bottom 0.15: v28.5,99.5 28.5,89 v28,88.5
IO/CHANGE  (via drill 0.3)
  Top 0.15: C10.1 52.5,108.4 51.75,109.15 CHANGE_BUTTON.3 CHANGE_BUTTON.4 46.5,109.15 R_CHANGE.2 45.5,108 38,108 v29.5,99.5 | U2.23 14,67.05 v14,68.5
  Bottom 0.15: v14,68.5 14,73 29.5,88.5 v29.5,99.5
MISO  (via drill 0.35)
  Top 0.15: D12.2 19.75,95.5 | 19.75,95.5 23.8,95.5 R8.1 | 19.75,95.5 15,95.5 13.2,93.7 J4.P7 7.8,93.7 v8.5,93 | U2.27 8.5,67 v8.5,68.5 | v10,35 10,36.13 U1.2 | TP6.TP v49,18
  Bottom 0.15: v8.5,93 v8.5,68.5 8.5,43.5 | 8.5,43.5 8.5,36.5 v10,35 | 8.5,43.5 9,43 17.5,43 19,41.5 35.5,41.5 47.5,29.5 47.5,19.5 v49,18
MOSI  (via drill 0.35)
  Top 0.15: 17.7,89.75 7.77,89.75 7.32,89.3 J4.P3 14.2,89.3 14.5,89 v14.5,88.5 | R7.1 24.05,89.75 17.7,89.75 | 17.7,89.75 18.45,90.5 D11.2 | v15,51 15.09,50.91 U2.7 | U1.5 12.85,44.95 v13,45.1 | TP7.TP v53.5,18.5 | J1.14 85.49,14.96 v85.15,15.3
  Bottom 0.15: v14.5,88.5 14.5,74.5 13.5,73.5 13.5,52.5 v15,51 15,47.1 v13,45.1 17.4,45.1 20,42.5 36,42.5 48.5,30 48.5,21.5 51.5,18.5 v53.5,18.5 56.7,15.3 v85.15,15.3
N$1
  Top 0.3: R_CAPACITOR.2 73.41,56.59 D7.1
N$2
  Top 0.15: R2-USB1.2 163.83,53.05 J2.A5
N$3
  Top 0.15: R2-USB2.1 163.17,55.67 163.55,56.05 J2.B5
N$4
  Top 0.3: C1_BAT1.1 140.35,50.65 142,49 144.5,49 145.35,49.85 145.35,53.8 142.97,56.18 142.82,56.18 | C1_BAT1.1 138.7,57.85 IC4.1 | C1_BAT1.1 139.25,58.95 139.25,59.25 139.05,59.45 IC4.3 | D2.1 142.93,56.28 142.82,56.18 | 142.82,56.18 Q1.2
N$5
  Top 0.15: D4.1 D3.2 86.2,31.1 C4.1
N$6
  Top 0.3: U5.5 148.5,53.65 R2_BAT.2
N$7
  Top 0.15: J1.24 79.25,14.5 77,16.31 EPD_C12.1
N$8
  Top 0.3: R1_BAT.1 148.45,57.62 U5.1
N$9
  Top 0.3: CHG_LED.C 148.32,59.25 R1_BAT.2
N$10
  Top 0.15: C_DELAY.1 72.17,102.63 IC1.5
N$13
  Top 0.15: J1.4 90.49,15.09 91.9,16.5 92.4,16.5 93.5,17.6 EPD_C1.1
N$14
  Top 0.15: EPD_C2.1 92.11,17.12 89.99,15 J1.5
N$25
  Top 0.15: EPD_C6.1 87.25,16.52 87.25,16.5 85,16.5 83.5,15 J1.18
N$26
  Top 0.15: EPD_C7.1 86.44,17.44 85.8,16.8 84.8,16.8 83,15 J1.19
N$27
  Top 0.15: J1.20 82.5,15 84.5,17 84.5,17.5 EPD_C8.1
N$29
  Top 0.15: J1.22 81.5,16.5 81,17 81,17.5 EPD_C10.1
PREVGH  (via drill 0.3)
  Top 0.15: 82,16.5 J1.21 | 82,16.5 82.5,17 82.5,17.5 EPD_C9.1 | D5.1 78,27.1 v78,23.5 | 82,16.5 82,19.95 v81.7,20.25
  Bottom 0.15: v78,23.5 81.25,20.25 v81.7,20.25
PREVGL  (via drill 0.35)
  Top 0.15: 80,16 81,15 J1.23 | 80,16 78.89,17.11 EPD_C11.1 | 80,16 80,20.5 v81,21.5 | v81,26 81,27.1 D4.2
  Bottom 0.15: v81,21.5 v81,26
RESE  (via drill 0.35)
  Top 0.15: R3.2 90.32,31.48 Q3.2 92.75,27.22 v92.75,26.75 | v92.65,16.1 92.55,16 92,16 90.99,14.99 J1.3
  Bottom 0.15: v92.75,26.75 92.75,16.2 v92.65,16.1
RESE'
  Top 0.15: R2.2 89.9,34.99 SJ1.2 89.52,33.58 R3.1
RESET  (via drill 0.3)
  Top 0.15: R_RESET.2 60.5,108.5 61,109 62.1,109 RESET_BUTTON.4 RESET_BUTTON.3 66.5,109.15 C5.1 68,108.15 68.3,107.85 68.3,105.8 67.77,105.27 IC1.1 67.5,102.5 v66.5,102.5 | v65,101 65,80 51,66 51,62 35,46 16.5,46 15,47.5 11,47.5 11,47.51 10.01,48.5 U2.3
  Bottom 0.15: v66.5,102.5 v65,101
RTC_RST  (via drill 0.35)
  Top 0.15: U2.16 22.71,68.11 v23.4,68.8 | U3.4 58.73,61.24 v60,62.5
  Bottom 0.15: v23.4,68.8 23.45,68.75 56.75,68.75 60,65.5 v60,62.5
RX
  Top 0.15: U2.24 12.55,68.87 TP2.TP
SCK  (via drill 0.35)
  Top 0.15: R6.1 24.32,93.35 19.6,93.35 D10.2 15.32,92.5 14.32,91.5 J4.P5 9,91.5 v10,90.5 | v14,51 14,49.55 U2.6 | U1.6 11.57,44.98 v11.7,45.1 | v54,14.5 54.5,14 TP8.TP | J1.13 85.99,13.99 v85.5,13.5
  Bottom 0.15: v10,90.5 10,55 v14,51 14,47.4 v11.7,45.1 12.8,44 17.5,44 19.5,42 35.7,42 48,29.7 48,20.5 v54,14.5 55,13.5 v85.5,13.5
SCL  (via drill 0.3, 0.35)
  Top 0.15: v24.65,70.75 21.25,70.75 18,67.5 18,67 U2.20 | U3.16 65,65 v63.5,65 | U4.7 143.75,50.1 v143.5,49.85 | v135.5,49 135.5,48 150.9,32.6 150.9,23.6 152,22.5 161.5,22.5 163.2,20.8 v163.5,20.8 J3.4 | R2_PINH.1 153.19,20.7 SENSOR2.4 155.3,20.7 v155.5,20.5
  Bottom 0.15: 62.6,65 63.5,64.1 63.5,51.2 65.7,49 v135.5,49 142.65,49 v143.5,49.85 | 62.6,65 56.85,70.75 v24.65,70.75 | 62.6,65 v63.5,65 | v155.5,20.5 163.2,20.5 v163.5,20.8
SDA  (via drill 0.35)
  Top 0.15: R1_PINH.1 152.21,18.53 153.59,19.9 SENSOR2.3 154.12,20 v155,20 | U2.19 18.9,67.4 21.6,70.1 v24.1,70.1 | U4.8 144.25,49.7 v144.2,49.65 | U3.15 63.77,63.78 v63,63 | v135,48.5 135,48 150.5,32.5 150.5,23.5 152,22 161.3,22 163.05,20.25 165.03,20.25 J3.3
  Top 0.152: 163.05,20.25 162.25,20.25 v162,20
  Bottom 0.15: v24.1,70.1 56.8,70.1 63,63.9 v63,63 63,51 65.5,48.5 v135,48.5 143.05,48.5 v144.2,49.65 | v155,20 v162,20
SRC
  Top 0.15: L1.1 77.22,31.28 77.45,31.05 D5.2 80.1,31.1 81,32 87,32 89.5,29.5 89.5,28.5 88.6,27.6 C4.2 90.92,27.6 Q3.3
SS_SD  (via drill 0.35)
  Top 0.15: 16.75,86.5 22.79,86.5 R10.1 | D8.2 16.75,86.5 | 16.75,86.5 15,86.5 13.3,88.2 J4.P2 8.8,88.2 v9.5,87.5 | v11,51 11,49.65 U2.4
  Bottom 0.15: v9.5,87.5 9.5,52.5 v11,51
TX
  Top 0.15: U2.25 11.28,70.76 TP1.TP
USB_D+  (via drill 0.35)
  Top 0.15: D1.1 157.35,53.78 152.06,48.49 v152.06,47.95 | U2.14 23.98,49.07 25.5,47.55 v25.5,47.5
  Bottom 0.15: v152.06,47.95 151.61,47.5 v25.5,47.5
USB_D-  (via drill 0.35)
  Top 0.15: D1.3 156.88,51.88 v152.5,47.5 | U2.13 22.71,49.07 24.91,46.87 v25.5,46.87
  Bottom 0.15: v152.5,47.5 151.87,46.87 v25.5,46.87
VBAT
  Top 0.3: 142.5,61.04 144.86,61.04 145.7,60.2 145.7,58.65 C2_BAT.1 146.5,56.35 U5.3 | 142.5,61.04 96.32,61.04 87.05,70.31 87.05,80.47 TP3.TP | 142.5,61.04 141.5,60.04 141.5,55.15 142.91,53.74 143.4,53.74 Q1.3 143.68,53.9 143.75,53.83 U4.2 U4.3
VBUS
  Top 0.3: C1_BAT.1 146.52,51.95 146.52,53.67 U5.4 | D2.2 142.99,59.49 142.99,58.86 144,57.85 R1_PWRUSB.2 144.65,57.7 144.65,56.12 Q1.1 144.6,55.94 146.55,53.99 U5.4 | U5.4 146.66,53.81 147.28,53.81 150.46,56.99 150.46,57.64 CHG_LED.A 151.9,57.75 | 151.9,57.75 | 151.9,57.75 C4_USB.1 | 151.9,57.75 153.4,57.75 C5_USB.1 156.35,57.85 156.5,58 | D1.5 159.67,52.83 159.5,53 159.5,54 159,54.5 158.5,54.5 156.5,56.5 156.5,58 | TP14.TP 157.79,63.29 156.38,61.88 PFMF.050.1.2 156.5,58.38 156.5,58
VRTC
  Top 0.3: R_CAPACITOR.1 C8.1 68.78,57.89 C10_SUPERCAP.2 67,59.41 67,62 66.5,62.51 U3.14
VUSB
  Top 0.3: J2.A9 J2.B4 | J2.A9 165.03,56.5 165.5,56.5 166,56 166,52.7 165.35,52.05 J2.B9 J2.A4 | J2.A9 163.15,56.85 161.5,58.5 PFMF.050.1.1